# EAGLE board projeto - PCB v0.9 (EAGLE 9.6.2)
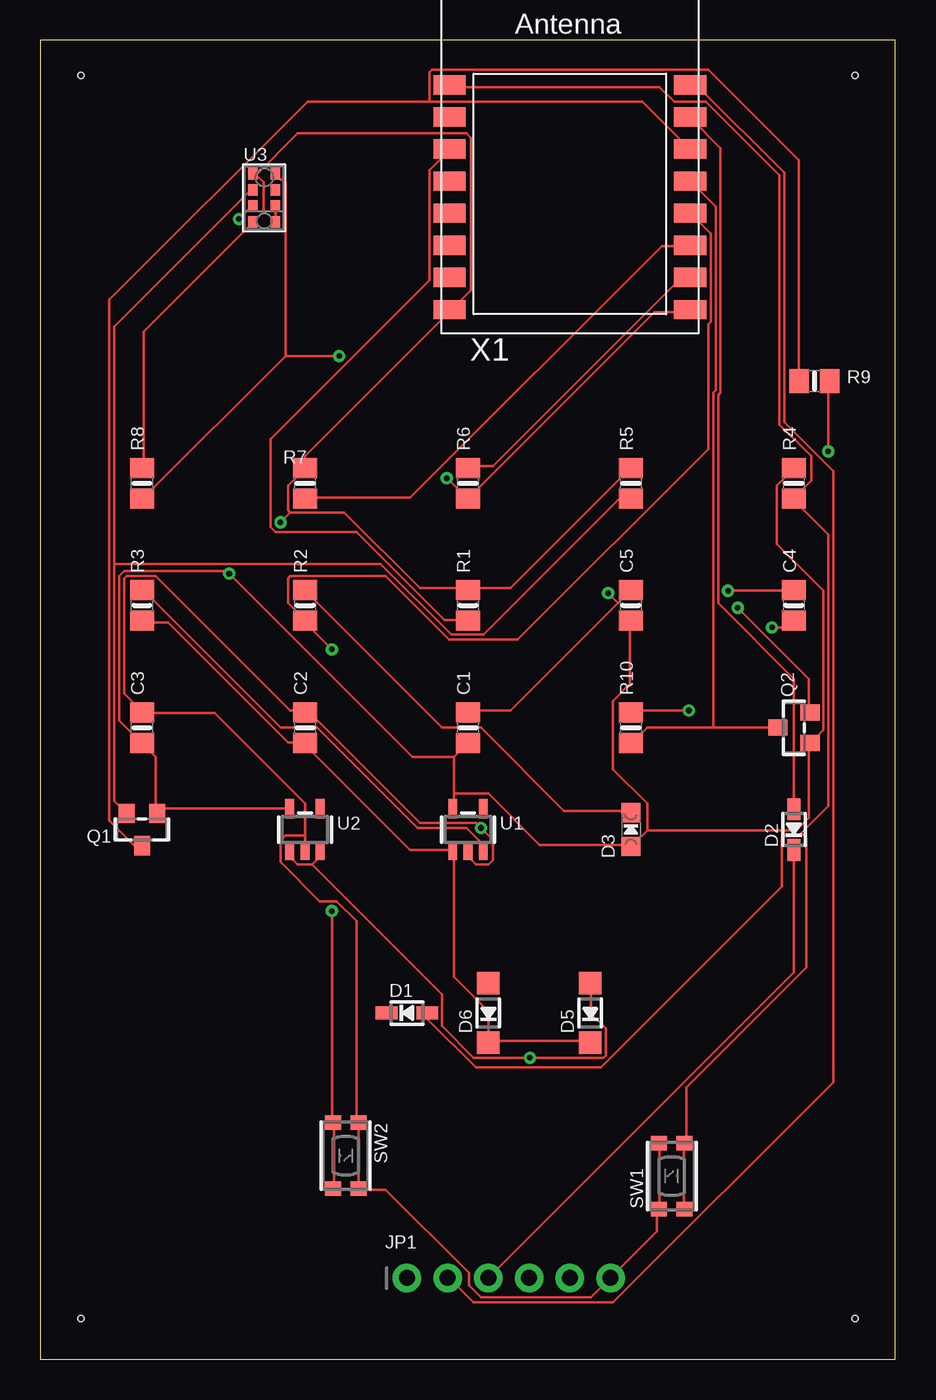
[diagram p0: board, top side]
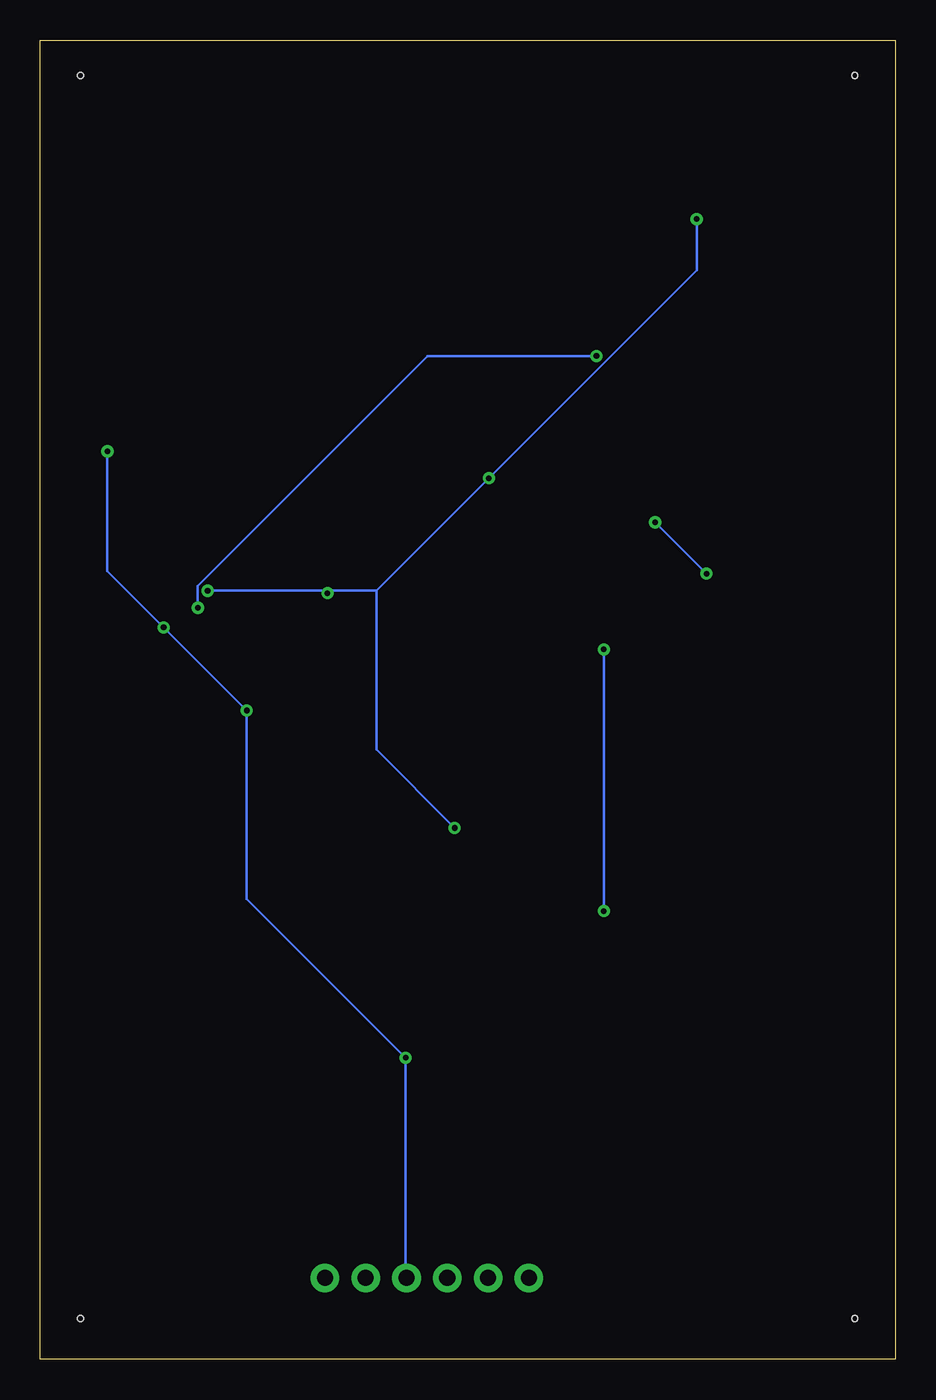
[diagram p1: board, bottom side, seen from below]

Size 53.32 x 82.22 mm. Coordinates in mm from the lower left corner, seen from the top.
Outline: 0,0 53.32,0 53.32,82.22 0,82.22 0,0
Copper layers (1*16): Top 0.035mm / dielectric 1.5mm / Bottom 0.035mm
Design rules "default": minimum track width 6mil, minimum drill 0.35mm, track to track 6mil, track to pad 6mil, pad to pad 6mil, via to via 6mil, smd to smd 6mil, copper to edge 40mil, drill to drill 6mil, minimum pad ring 10mil, minimum via ring 8mil, stop-mask expansion 4mil, vias tented up to drill 0mil, thermal gap 10mil
Holes 0.35 mm at 2.54,80.01 50.8,80.01 50.8,2.54 2.54,2.54

## Footprints (pad centres in the part's own frame; a part is rotated, then mirrored left to right if it is on the bottom)
0805-NO = smd 1.24 x 1.5: 1 -0.95,0; 2 0.95,0
SOD-323 = smd 1.35 x 0.8: A 1.27,0; C -1.27,0
CHIPLED_0805_NOOUTLINE = smd 1.2 x 1.2: A 0,-1.05; C 0,1.05
SOD-123 = smd 1.4 x 1.4: A 1.85,0; C -1.85,0
1X06_ROUND_70 = drill 1 pad 1.778: 1 -6.35,0; 2 -3.81,0; 3 -1.27,0; 4 1.27,0; 5 3.81,0; 6 6.35,0
SOT23-WIDE = smd 1 x 1.2: 1 -0.95,-1; 2 0.95,-1; 3 0,1
BTN_KMR2_4.6X2.8 = smd 0.9 x 1: A 2.05,0.8; A' -2.05,0.8; B 2.05,-0.8; B' -2.05,-0.8
SOT23-5 = smd 0.55 x 1.2: 1 -0.95,-1.3; 2 0,-1.3; 3 0.95,-1.3; 4 0.95,1.3; 5 -0.95,1.3
APDS-9960 = smd 0.6 x 0.72: 1 0.7,1.505; 2 0.7,0.505; 3 0.7,-0.495; 4 0.7,-1.495; 5 -0.7,-1.495; 6 -0.7,-0.495; 7 -0.7,0.505; 8 -0.7,1.505
ESP-12 = smd 2 x 1.2: 1 -7.5,4.5; 2 -7.5,2.5; 3 -7.5,0.5; 4 -7.5,-1.5; 5 -7.5,-3.5; 6 -7.5,-5.5; 7 -7.5,-7.5; 8 -7.5,-9.5; 9 7.5,-9.5; 10 7.5,-7.5; 11 7.5,-5.5; 12 7.5,-3.5; 13 7.5,-1.5; 14 7.5,0.5; 15 7.5,2.5; 16 7.5,4.5

## Placement (x,y rotation side)
C1  10uF  [0805-NO]  26.67,39.37 90 top
C2  10uF  [0805-NO]  16.51,39.37 90 top
C3  0.1uF  [0805-NO]  6.35,39.37 90 top
C4  10uF  [0805-NO]  46.99,46.99 90 top
C5  10uF  [0805-NO]  36.83,46.99 90 top
D1  1n4148  [SOD-323]  22.86,21.59 0 top
D2  1n4148  [SOD-323]  46.99,33.02 90 top
D3  RED  [CHIPLED_0805_NOOUTLINE]  36.83,33.02 0 top
D5  MBR120  [SOD-123]  34.29,21.59 90 top
D6  MBR120  [SOD-123]  27.94,21.59 90 top
JP1  FTDI  [1X06_ROUND_70]  29.21,5.08 0 top
Q1  BSS138  [SOT23-WIDE]  6.35,33.02 180 top
Q2  BSS138  [SOT23-WIDE]  46.99,39.37 90 top
R1  10K  [0805-NO]  26.67,46.99 90 top
R2  1K  [0805-NO]  16.51,46.99 90 top
R3  10K  [0805-NO]  6.35,46.99 90 top
R4  10K  [0805-NO]  46.99,54.61 90 top
R5  10K  [0805-NO]  36.83,54.61 90 top
R6  10K  [0805-NO]  26.67,54.61 90 top
R7  10K  [0805-NO]  16.51,54.61 90 top
R8  10K  [0805-NO]  6.35,54.61 90 top
R9  10K  [0805-NO]  48.26,60.96 0 top
R10  10K  [0805-NO]  36.83,39.37 90 top
SW1  KMR2  [BTN_KMR2_4.6X2.8]  39.37,11.43 90 top
SW2  KMR2  [BTN_KMR2_4.6X2.8]  19.05,12.7 270 top
U1  SPX3819  [SOT23-5]  26.67,33.02 0 top
U2  [SOT23-5]  16.51,33.02 0 top
U3  APDS-9960  [APDS-9960]  13.97,72.39 0 top
X1  ESP-12  [ESP-12]  33.02,74.93 0 top

## Library data of the parts
C1-C5 D1-D3 D5 D6 JP1 Q1 Q2 R1-R10 SW1 SW2 U1-U3 X1 = microbuilder

## Nets
3.3V: C1.1 C3.1 C5.1 D3.A Q1.1 Q2.1 R1.2 R4.2 R5.2 R7.2 R8.2 U1.5 U2.5 U3.5 U3.8 X1.8
ADC: X1.2
CH_PD: R1.1 X1.3
GND: C1.2 C2.2 C3.2 C4.2 C5.2 JP1.6 R6.1 SW1.A SW1.A' SW2.A SW2.A' U1.2 U2.2 U3.6 X1.9
GPIO0: R2.1 SW2.B SW2.B' X1.12
GPIO2: R7.1 X1.11
GPIO4_SDA: Q2.3 R10.1 X1.13
GPIO5_SCL: Q1.3 R9.1 X1.14
GPIO12: X1.6
GPIO13: X1.7
GPIO14: X1.5
GPIO15: R6.2 X1.10
GPIO16: X1.4
INT: U3.2
LDO_EN: R3.2 U1.3
N$2: C2.1 D5.C D6.C R3.1 U1.1
N$3: U3.3 U3.4
N$4: D3.C R2.2
RESET: D1.A R4.1 SW1.B SW1.B' X1.1
RESET_5V: D1.C
RXD: D2.A X1.15
RXD_5V: D2.C JP1.3
SCL_3V: Q1.2 R5.1 U3.7
SDA_3V: Q2.2 R8.1 U3.1
TXD: JP1.2 X1.16
VBAT: D6.A
VIN: C4.1 D5.A JP1.4 R9.2 R10.2 U2.1 U2.3

## Tracks (layer width: path | path; a pad name or v marks a point on that pad's centre or on a via)
3.3V  (via drill 0.35)
  Top 0.152: 13.46,73.81 13.31,73.97 U3.8 13.46,73.81 | 13.46,73.81 13.92,73.36 13.92,71.53 13.31,70.92 U3.5 13.16,70.76 6.45,64.06 6.45,55.68 R8.2 | R5.2 36.78,55.52 29.31,48.06 26.72,48.06 R1.2 26.57,48.06 23.67,48.06 18.95,52.78 15.6,52.78 | 15.6,52.78 15.44,52.93 15.44,54.46 16.51,55.52 R7.2 16.51,56.29 25.5,65.28 X1.8 25.65,65.43 26.87,66.65 26.87,76.1 26.57,76.4 16.05,76.4 13.46,73.81 | 7.21,34.34 7.21,37.54 6.45,38.3 C3.1 6.3,38.46 4.93,39.83 4.93,48.82 5.23,49.12 11.63,49.12 v11.79,48.97 23.22,37.54 25.81,37.54 | 7.21,34.34 7.21,34.04 Q1.1 7.21,34.34 | 7.21,34.34 15.44,34.34 U2.5 | 25.81,37.54 25.81,35.25 | 25.81,35.25 25.81,34.34 U1.5 | 25.81,37.54 26.57,38.3 C1.1 | 25.81,35.25 27.94,35.25 31.14,32.05 36.78,32.05 D3.A 36.93,32.05 37.85,32.97 | 37.85,32.97 47.14,32.97 47.9,33.73 47.9,38.3 Q2.1 48.06,38.46 48.82,39.22 48.82,47.9 45.92,50.8 45.92,54.46 46.99,55.52 R4.2 | 37.85,32.97 37.85,34.65 35.71,36.78 35.71,41.05 36.78,42.11 36.78,45.92 C5.1 | v14.99,52.17 15.6,52.78
  Bottom 0.152: v11.79,48.97 v14.99,52.17
CH_PD
  Top 0.152: R1.1 26.57,46.08 25.2,46.08 19.71,51.56 14.68,51.56 14.38,51.87 14.38,57.35 24.28,67.26 24.28,74.12 25.5,75.34 X1.3
GND  (via drill 0.35)
  Top 0.152: 36.02,47.14 36.78,47.9 C5.2 | 36.02,47.14 29.31,40.44 26.72,40.44 C1.2 | v12.39,71.07 13.16,71.83 U3.6 | v25.35,54.91 26.57,53.7 R6.1 26.72,53.7 38.3,65.28 40.44,65.28 X1.9 | v42.87,47.9 46.99,47.9 C4.2 | v35.41,47.75 36.02,47.14 | U1.2 26.72,31.6 26.72,31.29 27.18,30.84 27.94,30.84 28.24,31.14 28.24,32.36 v27.48,33.12 27.18,33.43 23.67,33.43 16.81,40.28 16.51,40.28 C2.2 16.51,40.44 15.6,40.44 7.21,48.82 5.38,48.82 5.23,48.67 5.23,41.5 6.3,40.44 C3.2 6.45,40.28 10.87,40.28 16.51,34.65 16.51,32.66 | 16.51,32.66 U2.2 | SW1.A 38.61,13.46 38.61,9.5 SW1.A' 38.46,9.35 38.46,7.98 JP1.6 34.34,3.86 27.48,3.86 26.72,4.62 26.72,5.38 21.54,10.57 19.86,10.57 SW2.A 19.86,10.72 19.86,14.68 SW2.A' 19.71,14.83 19.71,27.33 18.49,28.55 17.42,28.55 14.99,30.99 14.99,32.36 15.29,32.66 16.51,32.66
  Bottom 0.152: v12.39,71.07 12.39,67.87 v25.35,54.91 32.36,47.9 | 32.36,47.9 35.41,47.9 | 35.41,47.9 v42.87,47.9 | 35.41,47.9 v35.41,47.75 | 32.36,47.9 32.36,38 v27.48,33.12
GPIO0  (via drill 0.35)
  Top 0.152: SW2.B 18.34,10.72 18.34,14.68 SW2.B' 18.19,14.83 v18.19,27.94 | X1.12 40.59,71.37 41.81,70.16 41.81,64.67 41.66,64.52 41.66,56.74 29.77,44.86 25.5,44.86 21.54,48.82 15.6,48.82 15.44,48.67 15.44,47.14 16.51,46.08 R2.1 16.51,45.92 v18.19,44.25
  Bottom 0.152: v18.19,44.25 v18.19,27.94
GPIO2
  Top 0.152: R7.1 16.51,53.7 23.06,53.7 38.76,69.39 40.44,69.39 X1.11
GPIO4_SDA
  Top 0.152: 41.96,39.37 37.85,39.37 36.93,38.46 R10.1 | 41.96,39.37 Q2.3 | 41.96,39.37 41.96,60.25 42.11,60.4 42.11,71.83 40.59,73.36 X1.13
GPIO5_SCL
  Top 0.152: 24.28,78.38 37.54,78.38 40.44,75.49 X1.14 | 24.28,78.38 16.66,78.38 4.32,66.04 4.32,33.58 5.84,32.05 6.3,32.05 Q1.3 | 24.28,78.38 24.28,80.21 24.44,80.37 41.66,80.37 47.29,74.73 47.29,61.01 R9.1
GPIO15
  Top 0.152: R6.2 26.72,55.68 28.24,55.68 39.98,67.41 40.44,67.41 X1.10
LDO_EN
  Top 0.152: U1.3 27.48,31.75 27.48,32.21 26.57,33.12 23.52,33.12 17.27,39.37 14.99,39.37 6.45,47.9 R3.2
N$2
  Top 0.152: 27.94,19.86 34.19,19.86 D5.C | R3.1 6.45,45.92 7.98,45.92 15.44,38.46 16.51,38.46 C2.1 16.51,38.3 23.06,31.75 25.65,31.75 U1.1 25.81,31.6 25.81,23.82 27.94,21.69 27.94,19.86 | 27.94,19.86 D6.C
N$3
  Top 0.152: U3.4 14.68,70.92 14.68,71.83 U3.3
N$4
  Top 0.152: D3.C 36.78,34.19 32.66,34.19 27.48,39.37 25.04,39.37 16.51,47.9 R2.2
RESET
  Top 0.152: SW1.B' 40.13,9.5 40.13,13.46 SW1.B 40.28,13.61 40.28,16.97 47.75,24.44 47.75,32.51 47.45,32.82 | D1.A 24.13,21.23 27.18,18.19 34.95,18.19 46.23,29.46 46.23,32.51 46.38,32.66 47.29,32.66 47.45,32.82 | 47.45,32.82 49.12,34.49 49.12,51.41 46.99,53.54 R4.1 46.99,53.7 48.06,54.76 48.06,56.29 46.08,58.27 46.08,73.81 41.5,78.38 39.52,78.38 38.61,79.3 25.65,79.3 X1.1
RXD
  Top 0.152: D2.A 46.99,42.42 42.27,47.14 42.27,60.1 42.42,60.25 42.42,75.49 40.59,77.32 X1.15
RXD_5V
  Top 0.152: D2.C 46.99,24.13 JP1.3
SCL_3V
  Top 0.152: 4.62,49.58 4.62,34.8 5.38,34.04 Q1.2 | 4.62,49.58 4.62,64.36 13.01,72.75 13.16,72.75 U3.7 | 4.62,49.58 21.23,49.58 25.65,45.16 27.63,45.16 36.02,53.54 36.78,53.54 R5.1
SDA_3V  (via drill 0.35)
  Top 0.152: 15.29,62.53 15.29,73.36 15.14,73.51 14.99,73.51 14.68,73.81 U3.1 | 15.29,62.53 6.45,53.7 R8.1 | v43.48,46.84 47.9,42.42 47.9,40.44 Q2.2 | 15.29,62.53 v18.64,62.53
  Bottom 0.152: v43.48,46.84 43.48,48.21 29.16,62.53 v18.64,62.53
TXD
  Top 0.152: X1.16 40.59,79.3 41.05,79.3 46.38,73.97 46.38,58.42 49.43,55.37 49.43,17.27 35.71,3.56 27.03,3.56 25.5,5.08 JP1.2
VIN  (via drill 0.35)
  Top 0.152: v40.44,40.44 36.93,40.44 R10.2 | v45.62,45.62 46.68,45.62 46.99,45.92 C4.1 | v49.12,56.59 49.12,60.86 R9.2 | 16.97,30.84 16.05,30.84 15.6,31.29 15.6,31.6 U2.1 | 16.97,30.84 17.42,31.29 17.42,31.6 U2.3 | 16.97,30.84 25.04,22.76 25.04,20.78 27.03,18.8 v30.53,18.8 35.1,18.8 35.26,18.95 35.26,20.62 34.34,21.54 34.34,23.37 D5.A
  Bottom 0.152: v49.12,56.59 49.12,49.12 v45.62,45.62 v40.44,40.44 40.44,28.7 v30.53,18.8 30.53,5.08 JP1.4